# Altium PCB 06002480宁波2号线二期车载PIS系统_功率放大器音频板2 BHC-A-2030-05_PCB V1.0.PcbDoc (part 1 of 6)
Units mil, origin at the board's own origin, x right, y up, seen from the top; angles counter-clockwise.
Board outline 3385.83 x 3779.53 mil, 4 copper layers (Top Layer, GND, VDD, Bottom Layer); 210 components, 185 nets, 792 pads, 313 vias.
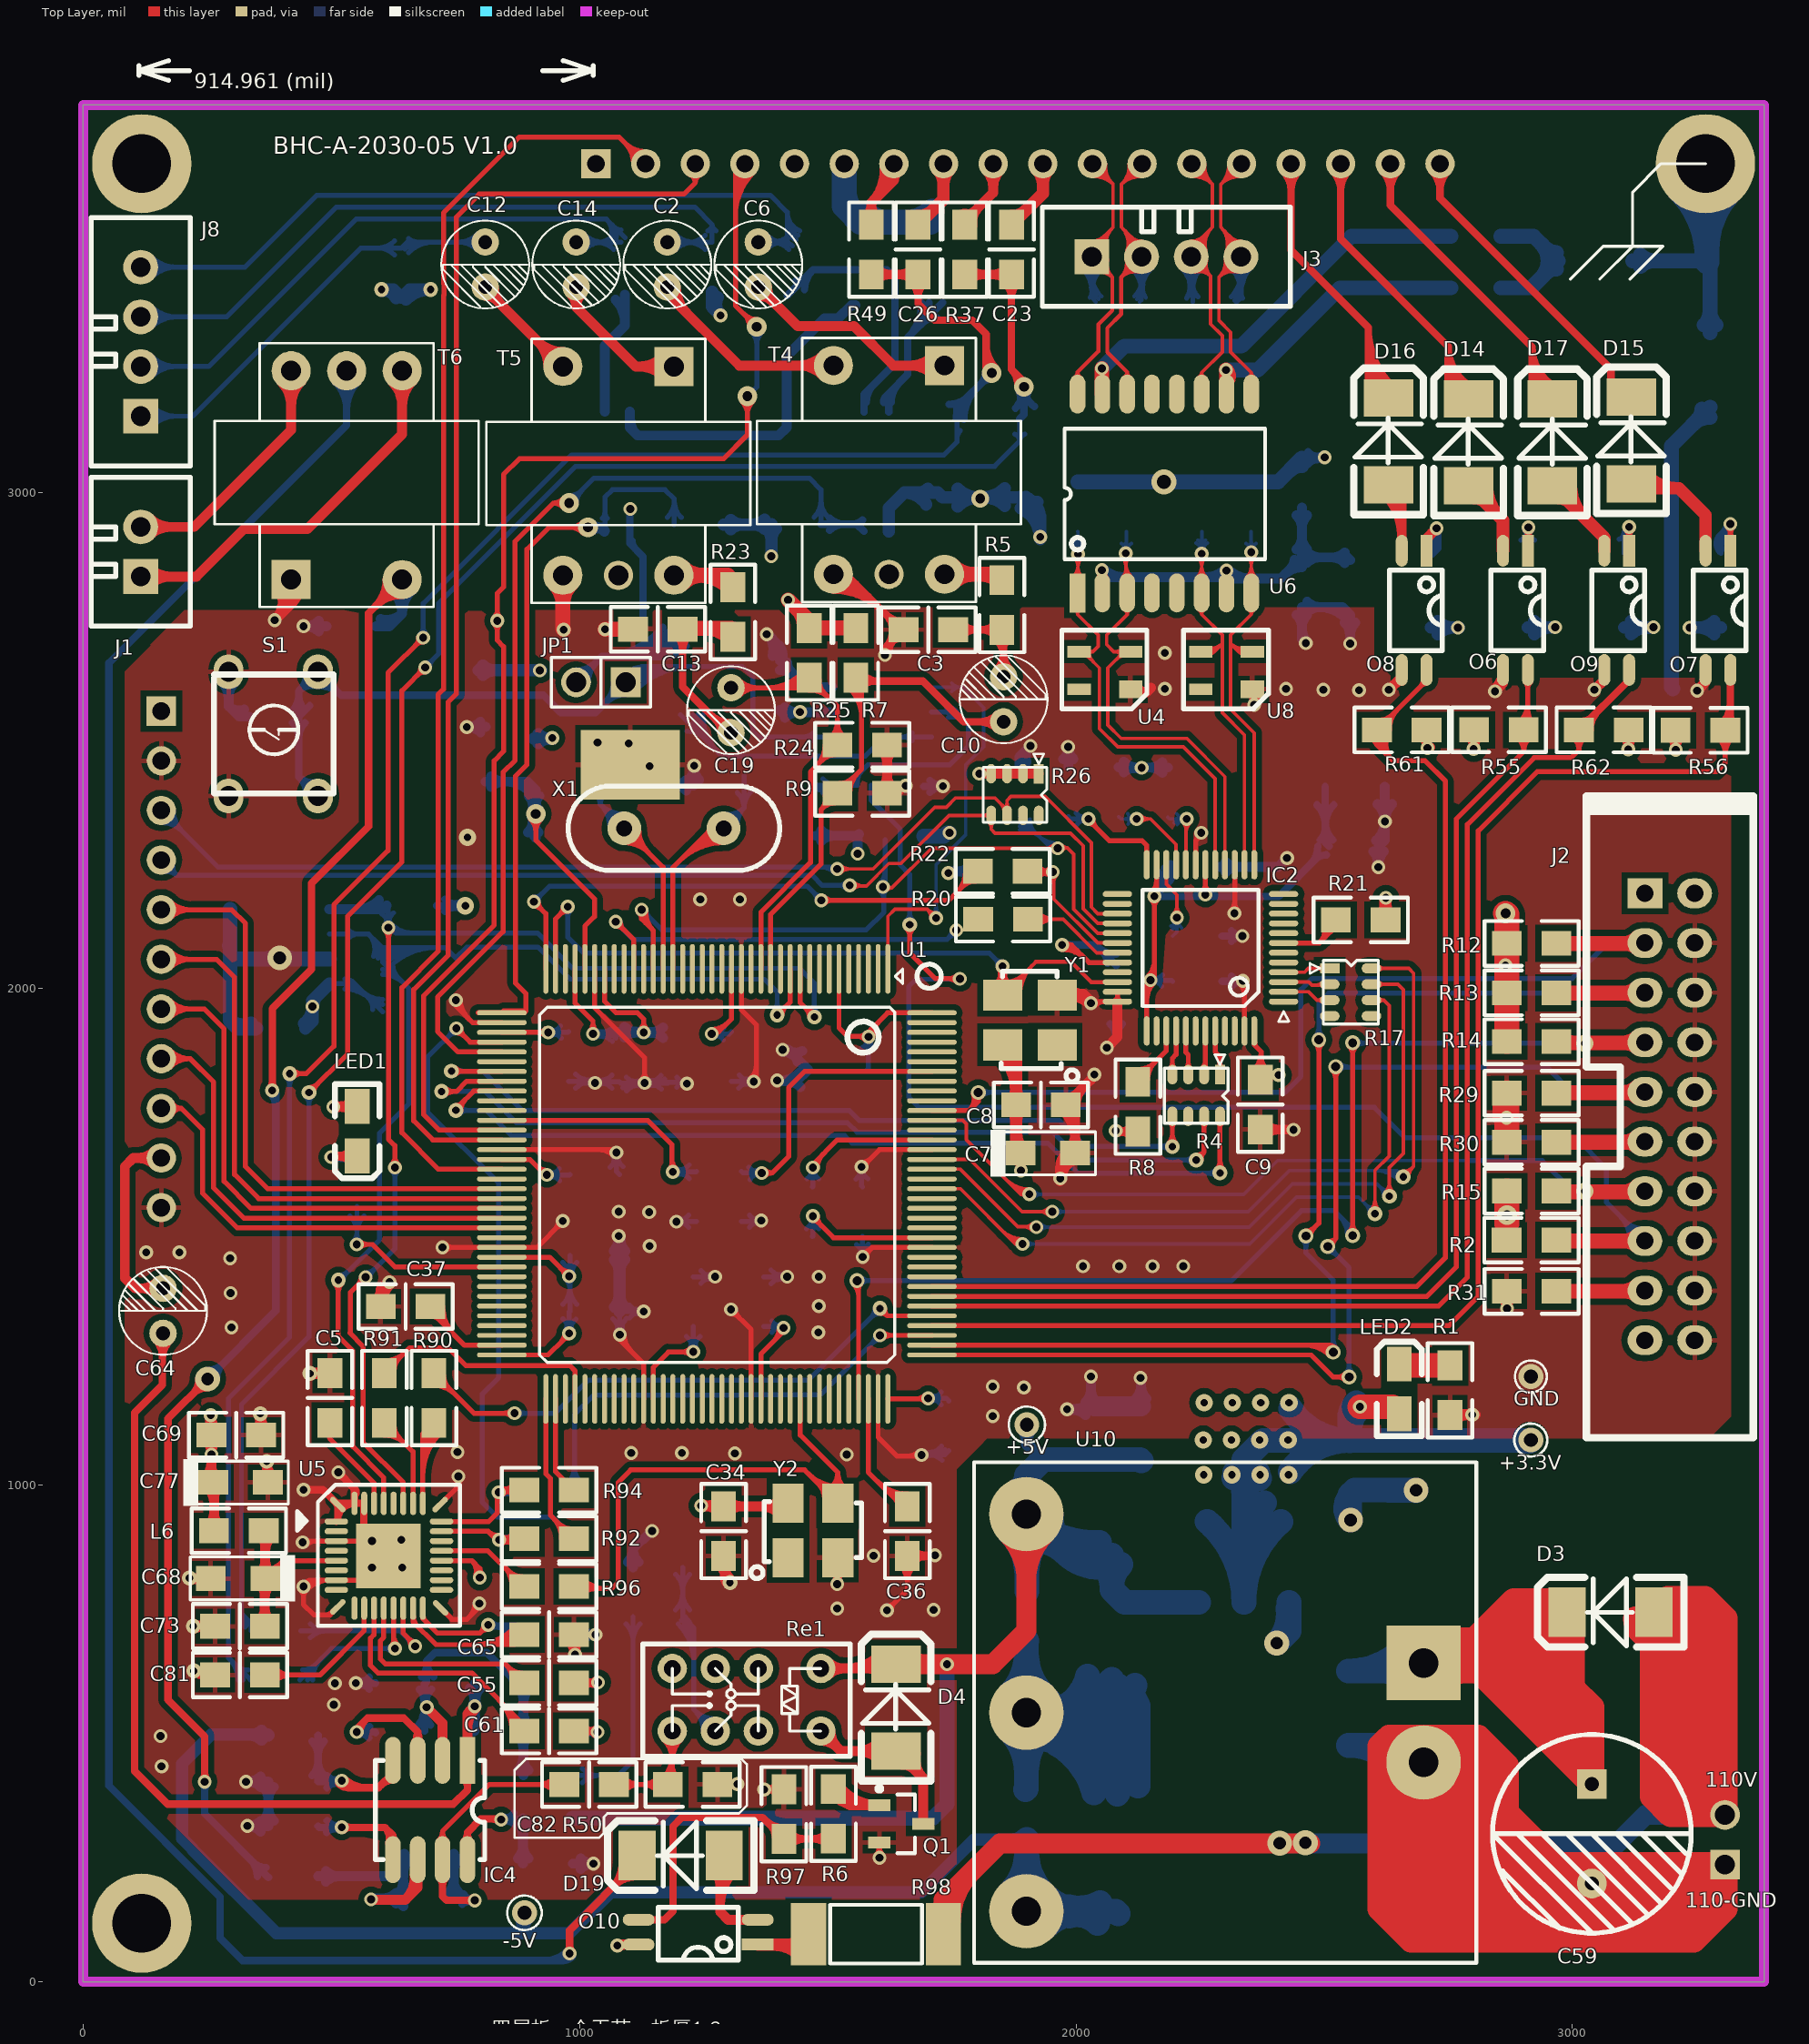
[diagram p0: Top Layer view]
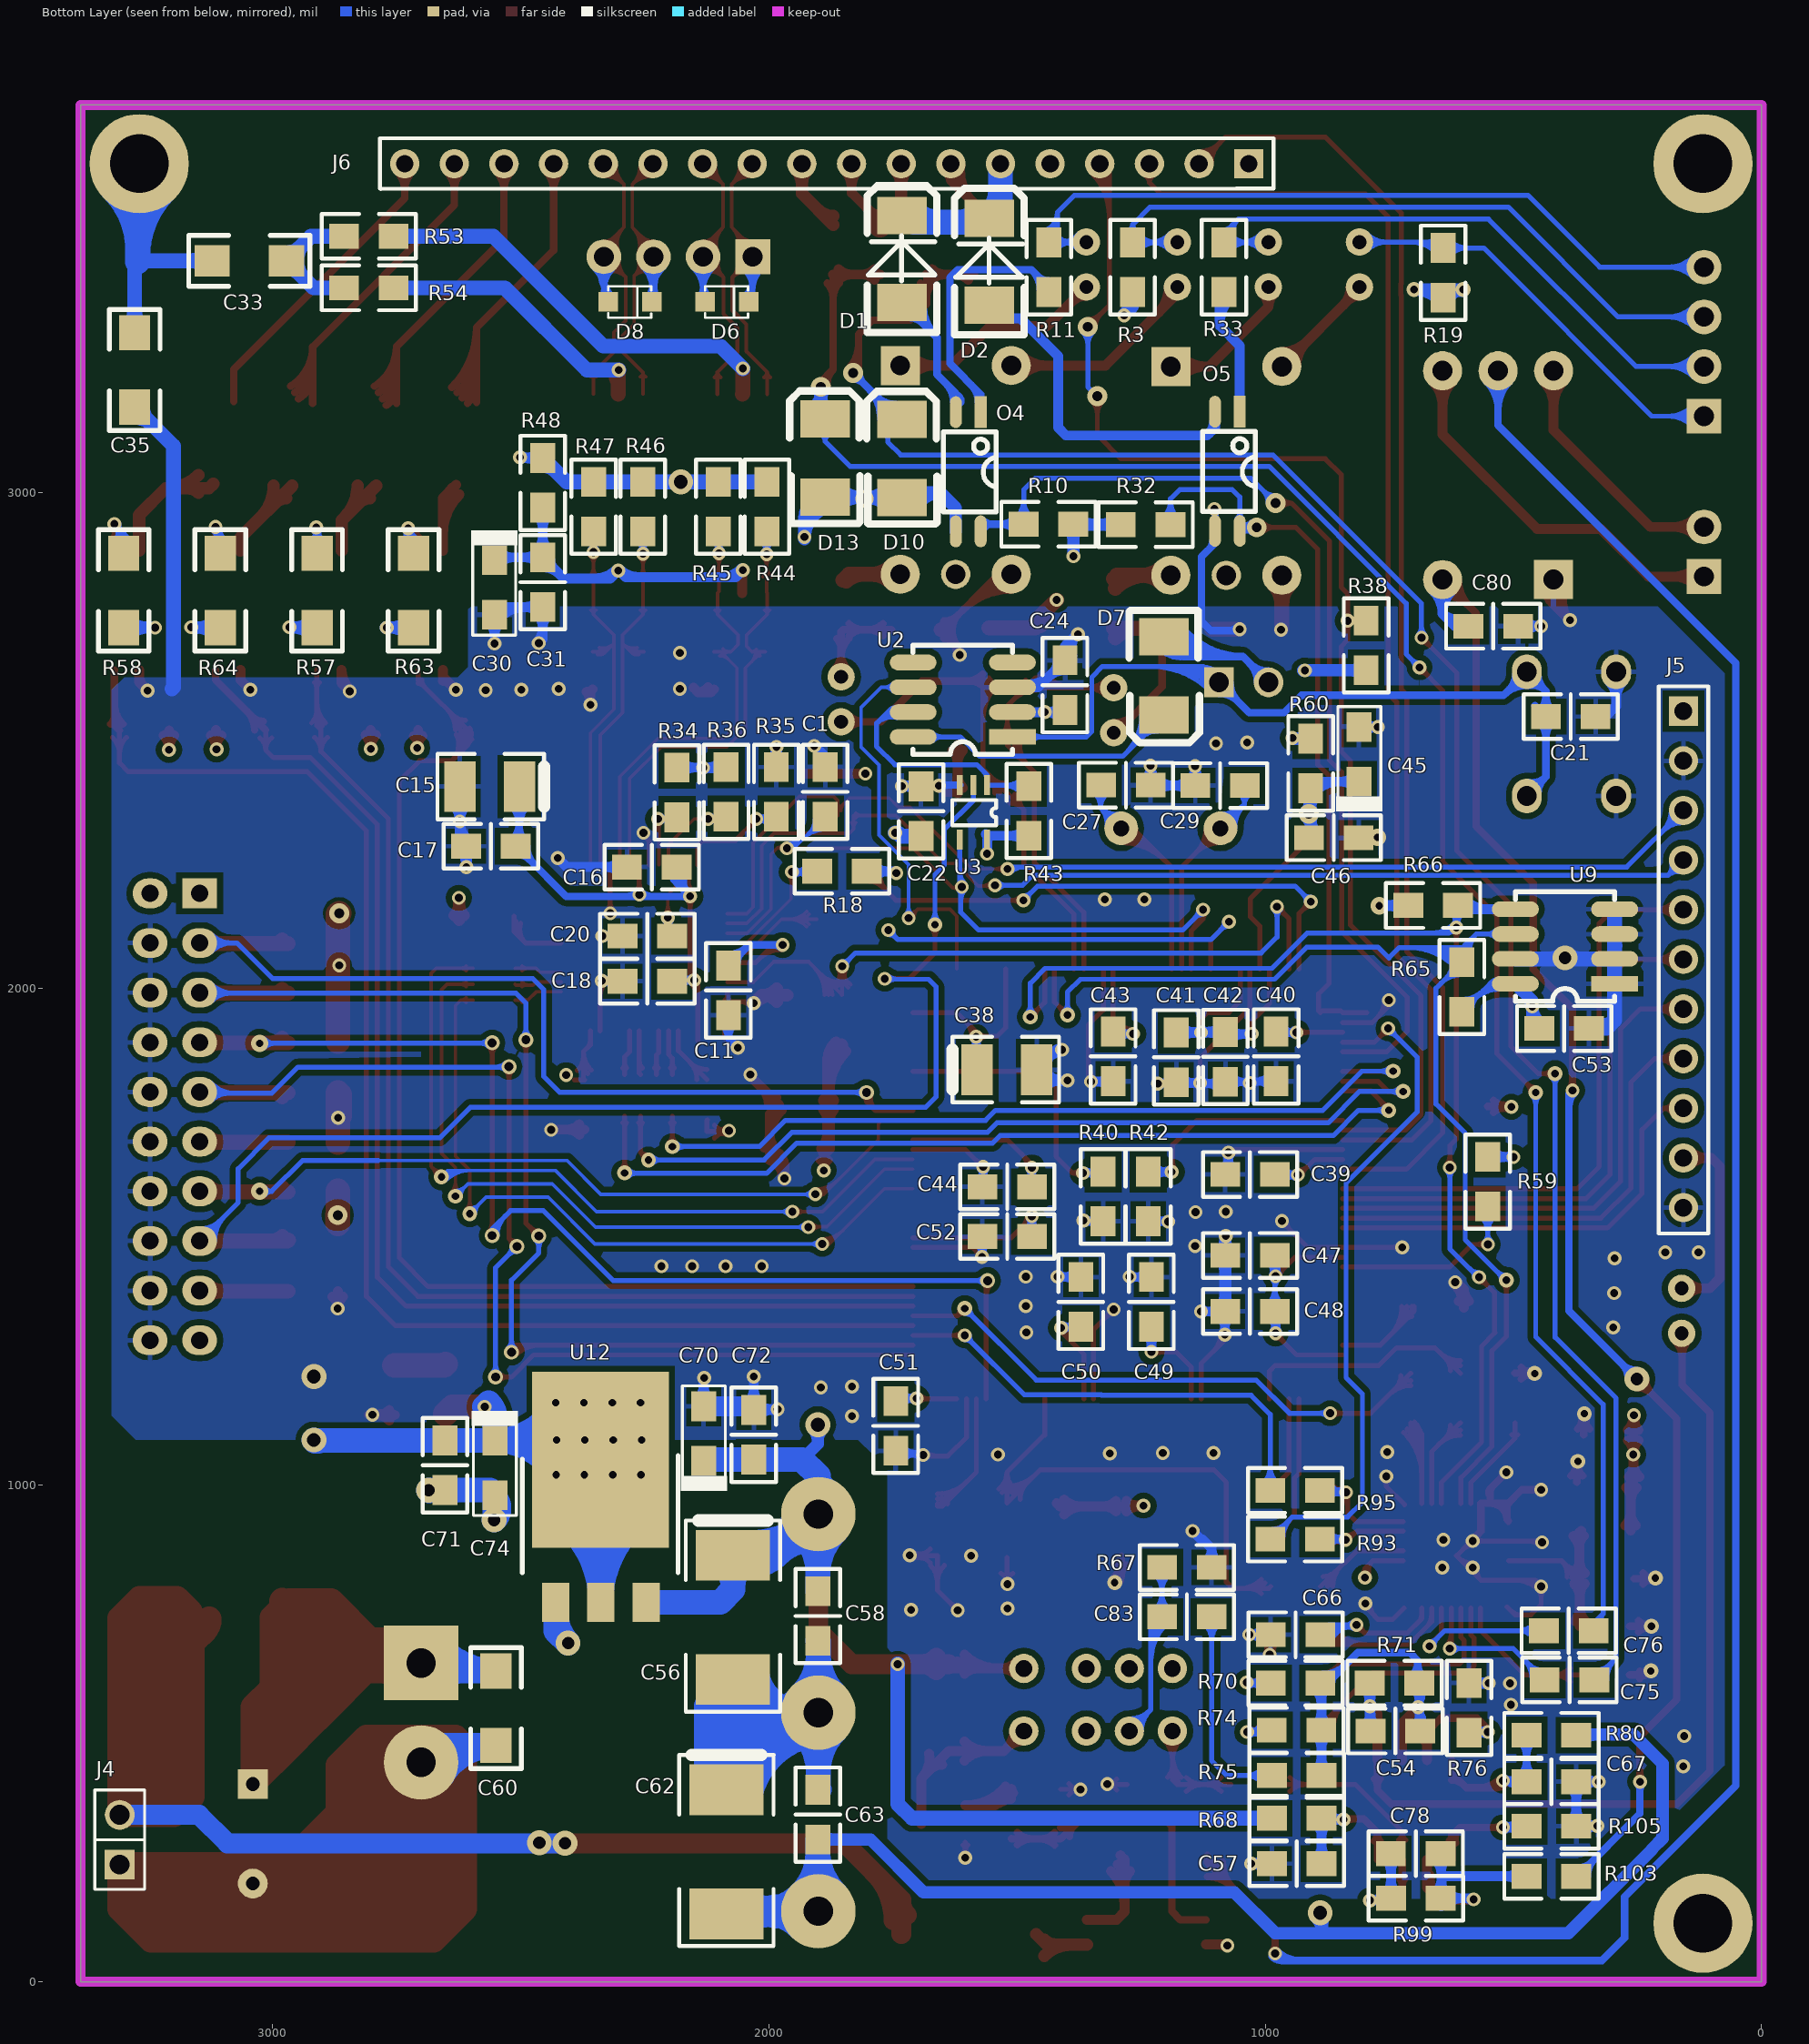
[diagram p1: Bottom Layer view, seen from below]
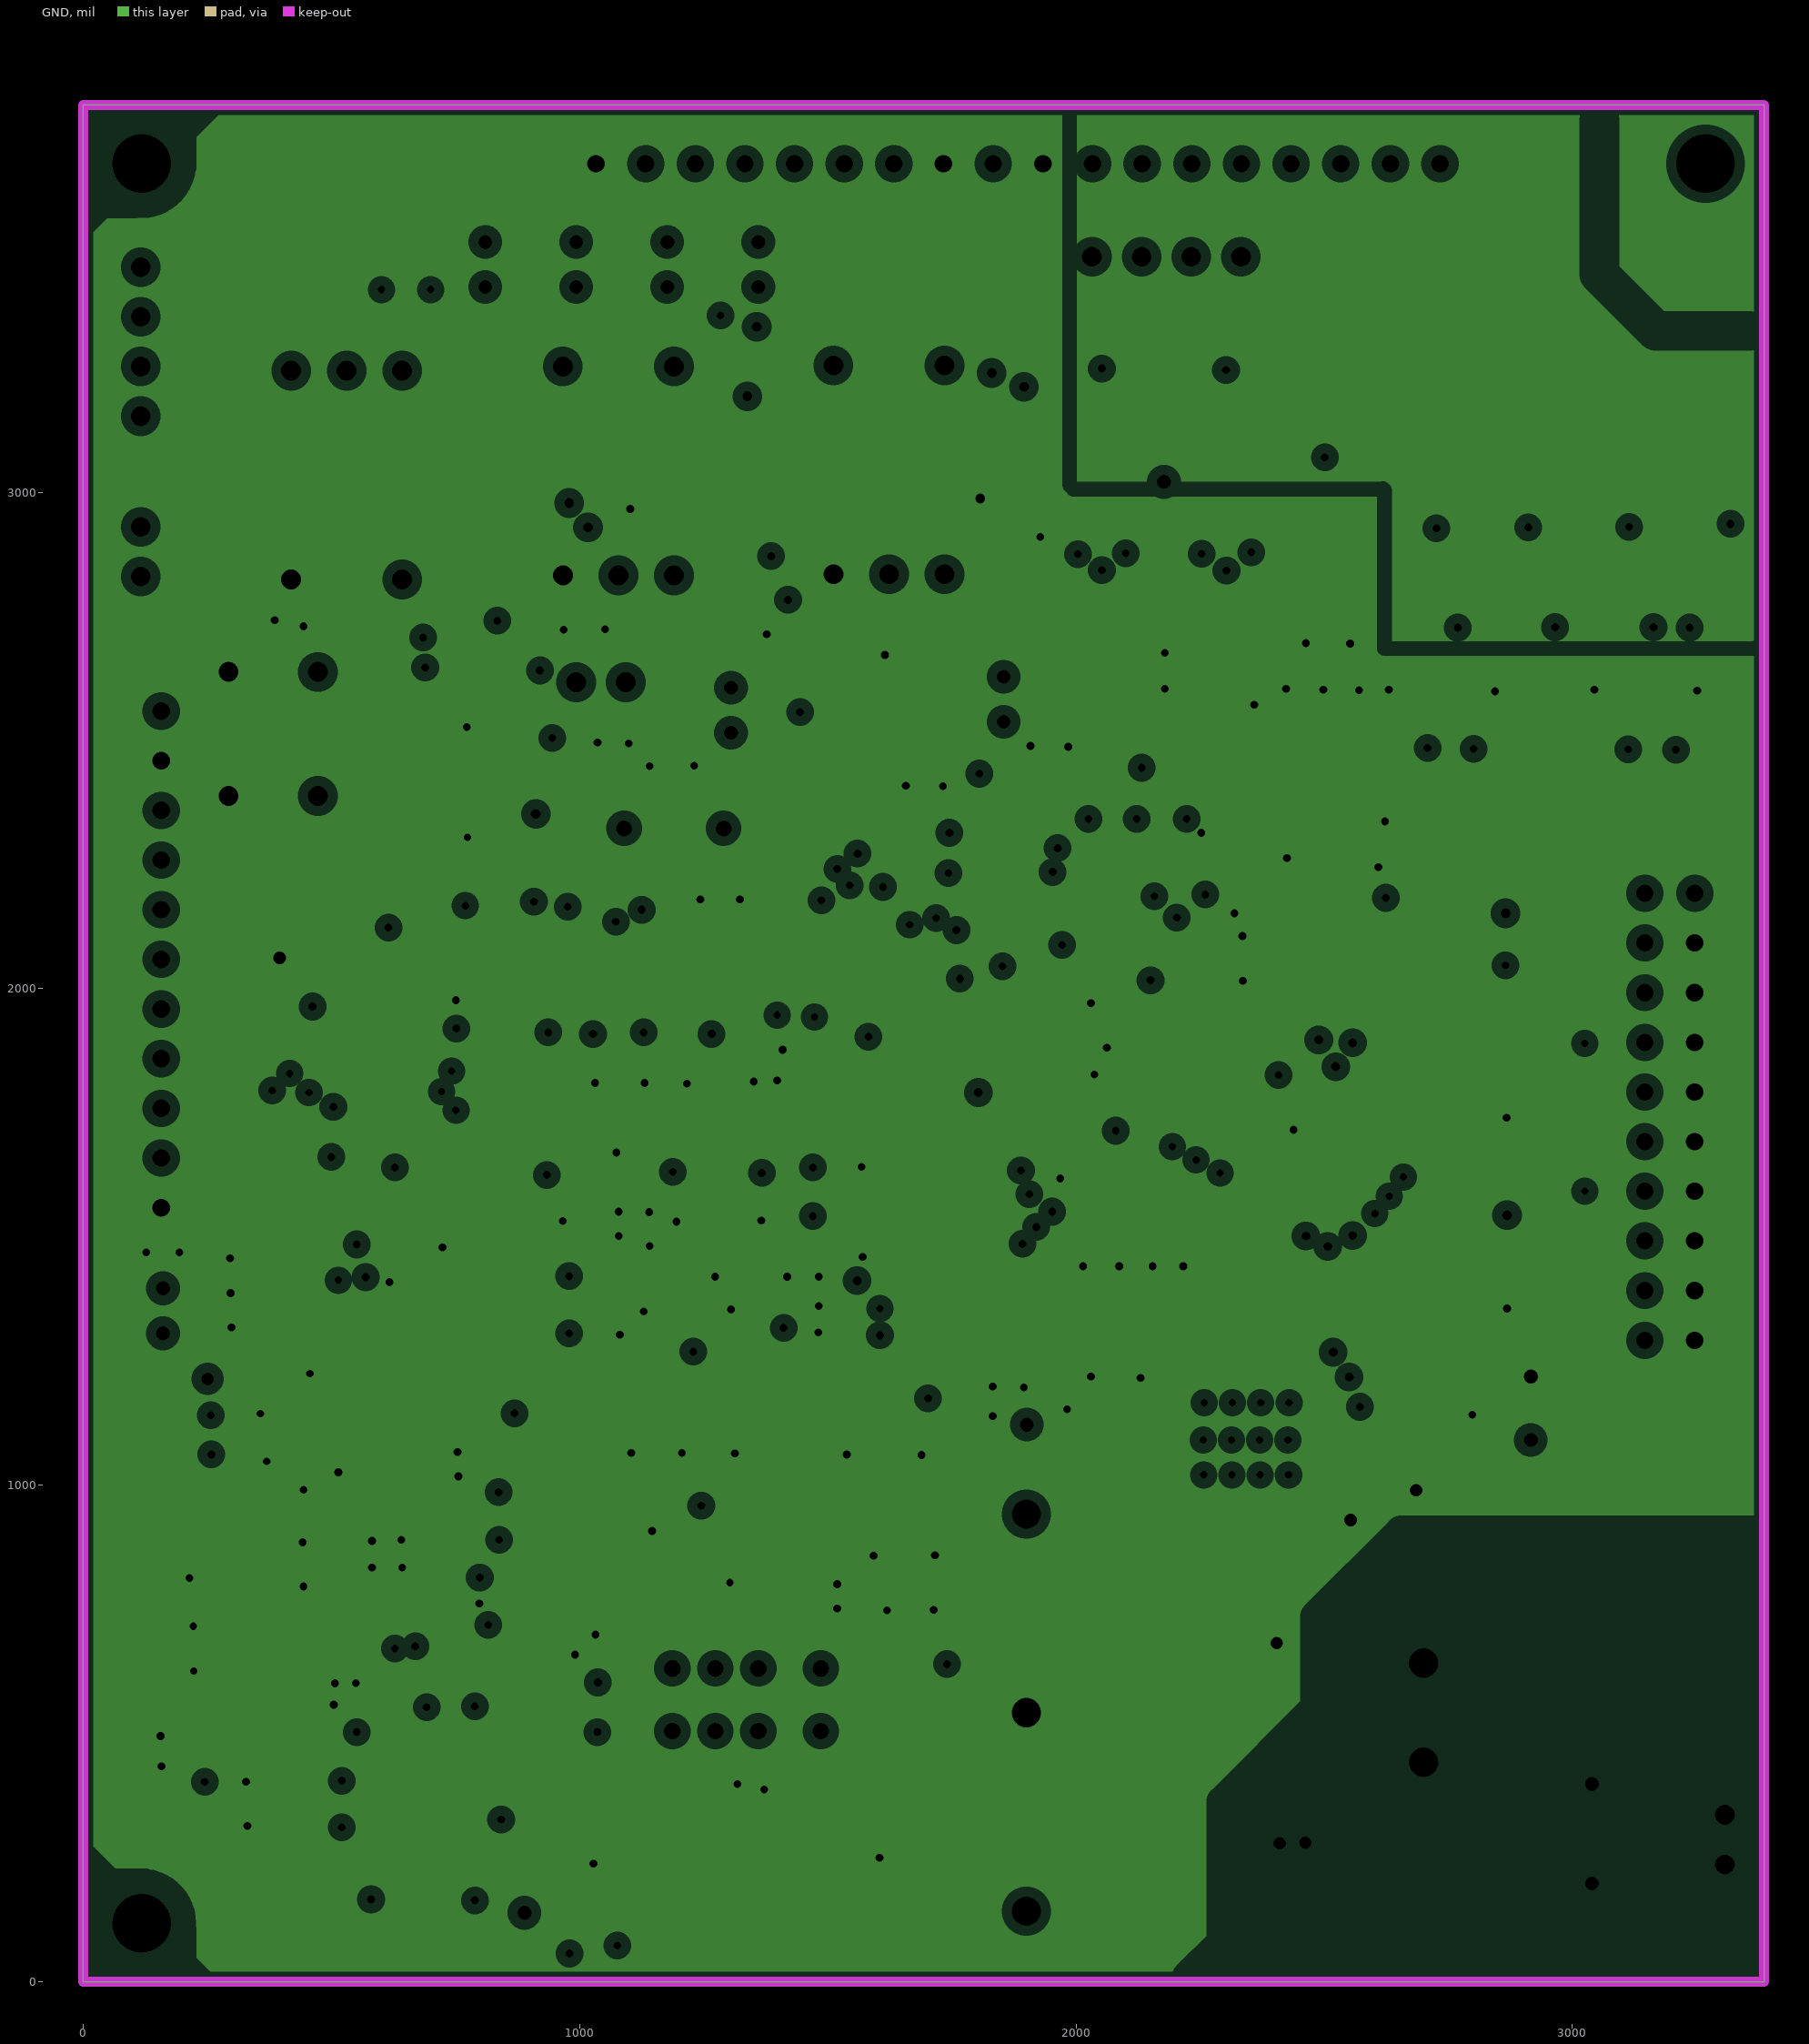
[diagram p2: GND, clearances drawn from the general rule]
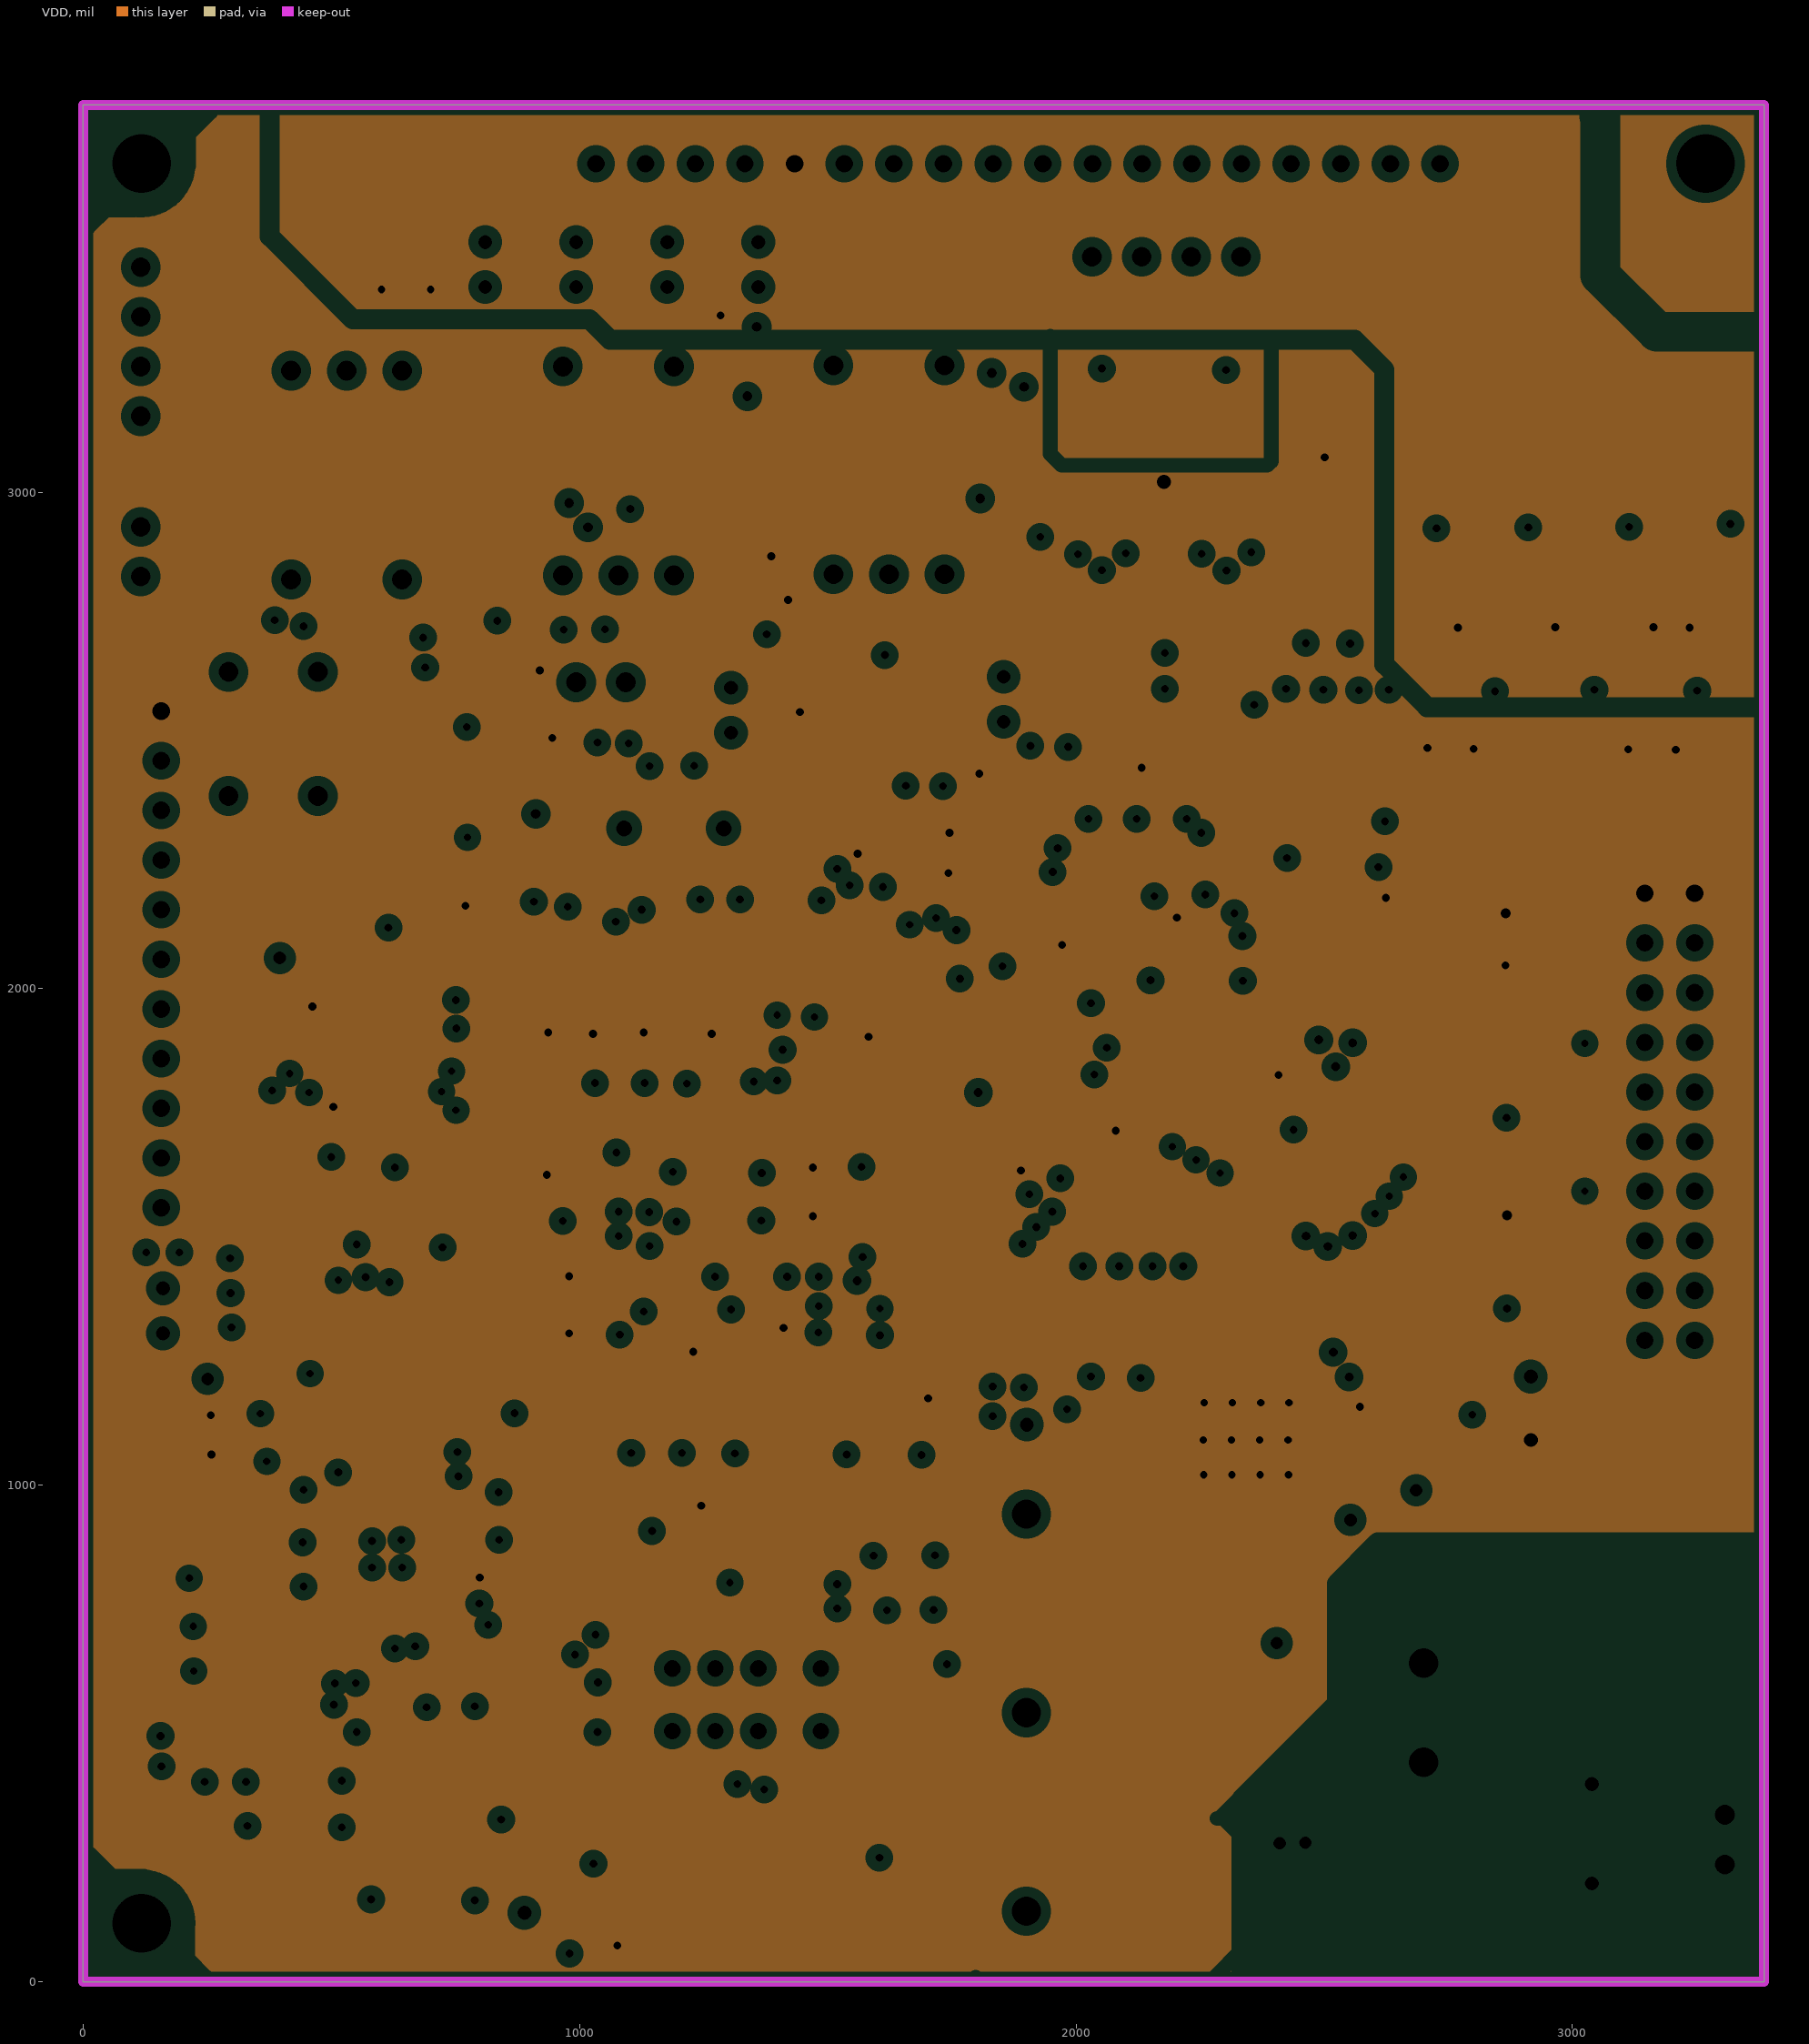
[diagram p3: VDD, clearances drawn from the general rule]
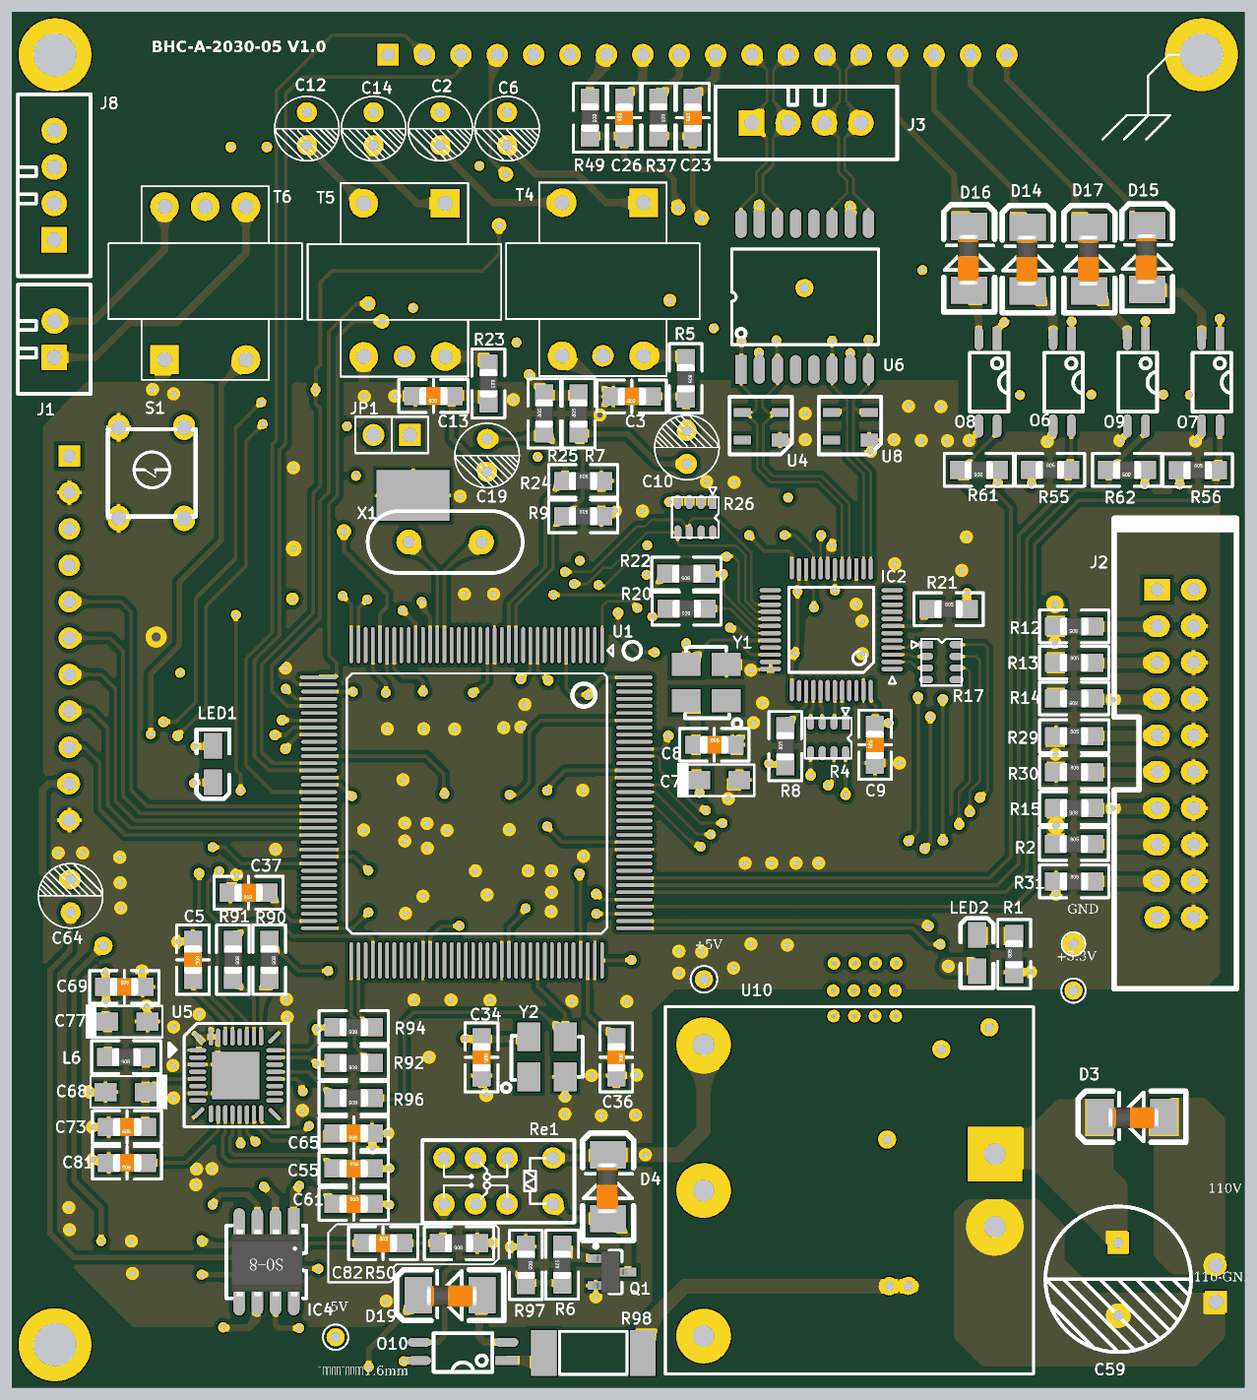
[diagram p9: 3D render of the assembled board from above, using the file's embedded part models]
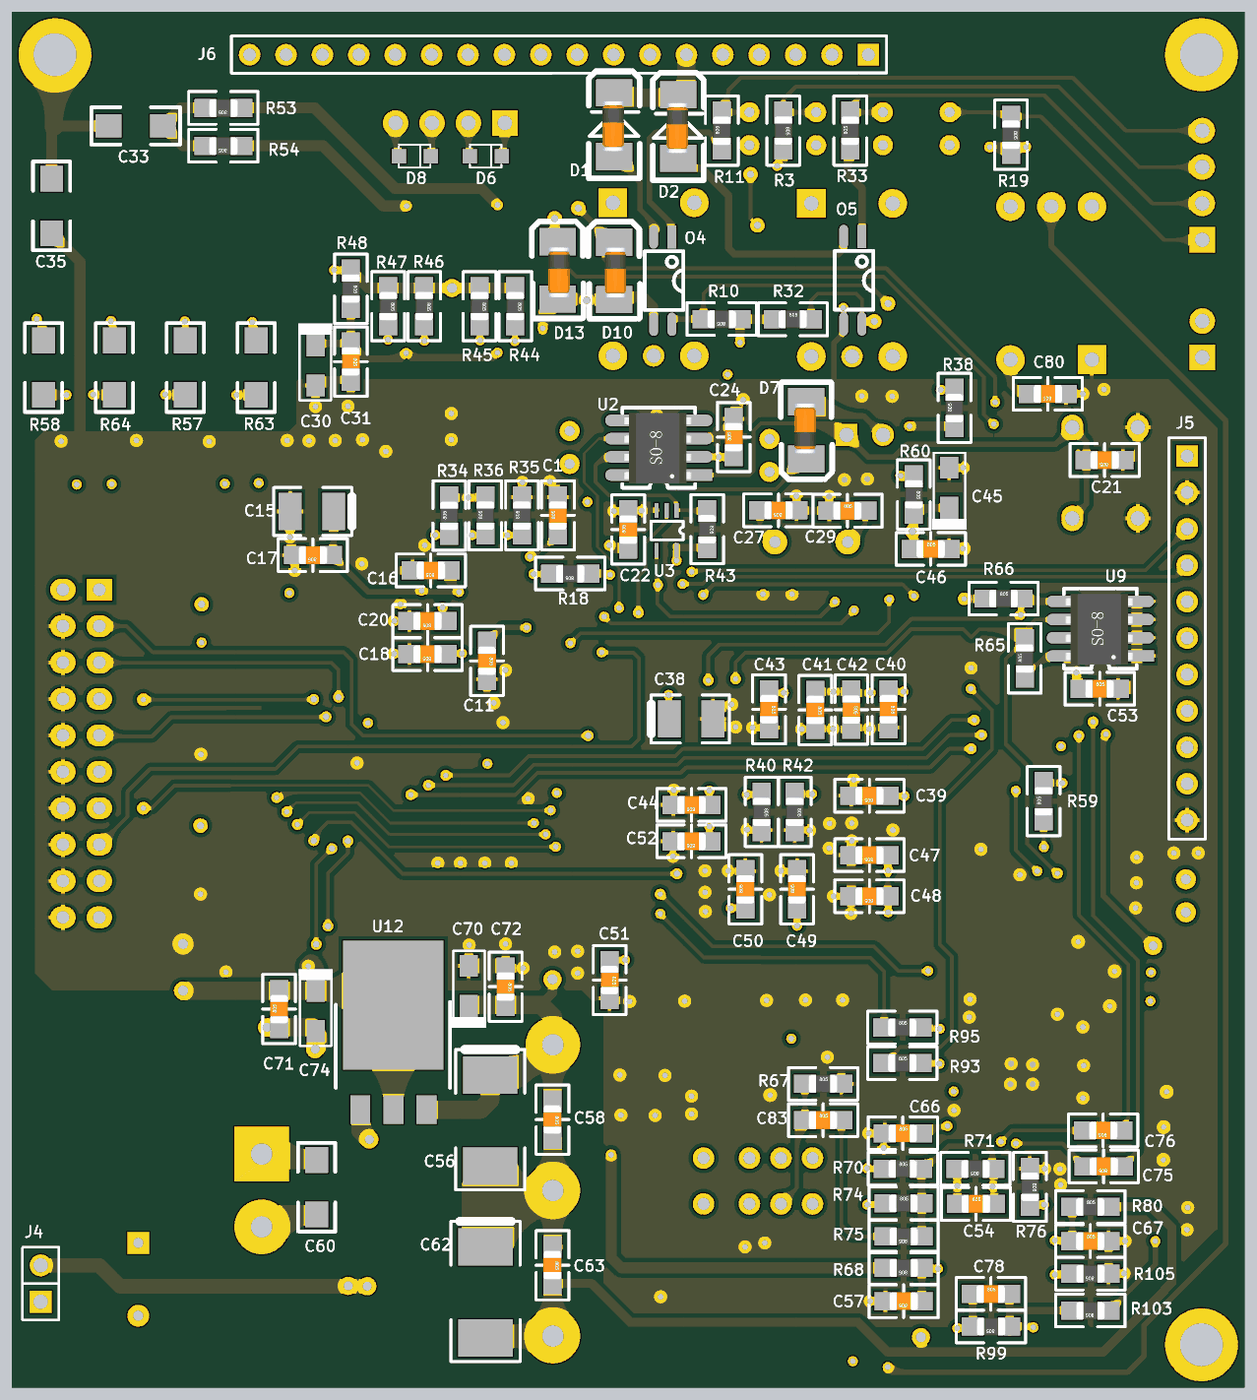
[diagram p10: 3D render of the assembled board from below, using the file's embedded part models]

## Layer stack, top to bottom
Top Layer: signal copper 1.4
Dielectric: core 12.6, FR-4, Dk 4.8
GND: plane copper 1.4, net (Multiple Nets)
Dielectric: prepreg 12.6, FR-4, Dk 4.8
VDD: plane copper 1.4, net (Multiple Nets)
Dielectric: core 12.6, FR-4, Dk 4.8
Bottom Layer: signal copper 1.4

## Board outline
0,0 0,3779.53 3385.83,3779.53 3385.83,0

## Design rules (kind name [scope] priority, off if disabled: settings)
Clearance Clearance_1 [InPolygon] p1: gap=12
Clearance [All] p2: gap=7
ComponentClearance [All] p1: gap=0 collisioncheckmode=3 verticalgap=0 showdistances=FALSE
DiffPairsRouting [All] p1: maxlimit=10 minlimit=10 mostfreqgap=10 maxuncoupledlength=500
HoleSize [All] p1: absolutevalues=TRUE maxlimit=500 minlimit=1 maxpercent=80.000 minpercent=20.000
HoleToHoleClearance [All] p1: gap=0 allowstackedmicrovias=TRUE
MinimumSolderMaskSliver [All] p1: minsoldermaskwidth=0
PlaneClearance [All] p1: clearance=20
PlaneConnect [All] p1: planeconnectstyle=Relief reliefexpansion=20 reliefentries=4 reliefconductorwidth=25 reliefairgap=15
PolygonConnect PolygonConnect_1 [Isvia] p1: connectstyle=Direct reliefconductorwidth=10 reliefentries=4 polygonreliefangle="90 Angle" airgapwidth=10
PolygonConnect [All] p2: connectstyle=Relief reliefconductorwidth=10 reliefentries=4 polygonreliefangle="90 Angle" airgapwidth=10
RoutingVias [All] p1: holewidth=20 width=40 viastyle="Through Hole" minholewidth=15 minwidth=28 maxholewidth=28 maxwidth=50
SilkToSilkClearance [All] p1: silktosilkclearance=0
SilkToSolderMaskClearance [IsPad] p1: minsilkscreentomaskgap=0 clearancetoexposedcopper=TRUE
SolderMaskExpansion [All] p1: expansion=4
Width [All] p1: maxlimit=50 minlimit=7 preferedwidth=10 minimp=50.000000 maximp=50.000000 favimp=50.000000
19 further rules are at their usual default settings.

## Classes and differential pairs
differential pair MB_TX: +MB_TX_P -MB_TX_N
differential pair MB_RX: +MB_RX_P -MB_RX_N
differential pair RD: +RD_P -RD_N
differential pair TD: +TD_P -TD_N

## Components (designator, comment, footprint, x,y, rotation, side; value= is the part's Value field where it differs from the comment)
C1 "100n" C0805 1886,2396 r270 bottom
C2 "10uF/25V" RB1/2 1176.67,3503.55 r270 top
C3 "" C0805 1703,2723 r0 top
C5 "100n" C0805 497,1176 r90 top
C6 "10uF/25V" RB1/2 1360,3503.55 r270 top
C7 "" 3216A 1943,1669 r0 top
C8 "104" C0805 1929,1766 r180 top
C9 "104" C0805 2371,1766 r270 top
C10 "10uF/25V" RB1/2 1854,2537.45 r90 top
C11 "104" C0805 2081,1997 r90 bottom
C12 "10uF/25V" RB1/2 810,3503.55 r270 top
C13 "" C0805 1158,2724 r0 top
C14 "10uF/25V" RB1/2 993.33,3503.55 r270 top
C15 "10uF/16V" CAP-B 2502,2407 r0 bottom
C16 "104" C0805 2235,2245 r180 bottom
C17 "104" C0805 2559,2287 r180 bottom
C18 "104" C0805 2244,2015 r180 bottom
C19 "10uF/25V" RB1/2 1305,2606 r270 top
C20 "104" C0805 2244,2106 r180 bottom
C21 "102" C0805 384,2548 r180 bottom
C22 "104" C0805 1693,2357 r270 bottom
C23 "" C0805 1870,3488 r270 top
C24 "104" C0805 1403,2611 r270 bottom
C26 "" C0805 1681.78,3488 r270 top
C27 "" C0805 1280,2410 r180 bottom
C29 "22pF" C0805 1091,2409 r0 bottom
C30 "10uF/10V" 3216A 2552,2808 r270 bottom
C31 "104" C0805 2455,2819 r90 bottom
C33 "1000p(2KV)" C1206 3046,3466 r180 bottom
C34 "104" C0805 1290,908 r90 top
C35 "1000p(2KV)" C1206 3277,3246 r270 bottom
C36 "2.2uF" C0805 1660,908 r90 top
C37 "2.2uF" C0805 650,1360 r0 top
C38 "" CAP-B 1580,1837 r180 bottom
C39 "104" C0805 1030,1626 r180 bottom
C40 "104" C0805 978,1864 r90 bottom
C41 "104" C0805 1179,1862 r90 bottom
C42 "104" C0805 1080,1863 r90 bottom
C43 "104" C0805 1306,1864 r90 bottom
C44 "104" C0805 1519,1601 r180 bottom
C45 "" 3216A 811,2472 r90 bottom
C46 "104" C0805 862,2304 r0 bottom
C47 "104" C0805 1030,1463 r180 bottom
C48 "104" C0805 1030,1350 r180 bottom
C49 "104" C0805 1229,1369 r270 bottom
C50 "104" C0805 1371,1369 r270 bottom
C51 "104" C0805 1744,1120 r90 bottom
C52 "104" C0805 1519,1501 r180 bottom
C53 "104" C0805 398,1920 r0 bottom
C54 "47pF" C0805 738,505 r0 bottom
C55 "104" C0805 938.31,602.06 r180 top
C56 "100uF/16V" CAP-D 2072,859 r270 bottom
C57 "104" C0805 935.96,238 r180 bottom
C58 "104" C0805 1901,737 r90 bottom
C59 "100uF/16V" E100 3039,398 r270 top
C60 "" M1206 2549,551 r90 bottom
C61 "104" C0805 938.31,505 r180 top
C62 "100uF/16V" CAP-D 2085,387 r270 bottom
C63 "104" C0805 1901,337 r90 bottom
C64 "10uF/25V" RB1/2 161,1306 r90 top
C65 "1uF" C0805 939.04,699.22 r0 top
C66 "1uF" C0805 939,699 r0 bottom
C67 "104" C0805 423.69,403 r0 bottom
C68 "22uF/6.3V" 3216A 312,812 r180 top
C69 "100n" C0805 308,1101 r180 top
C70 "10uF/10V" 3216A 2131,1104 r90 bottom
C71 "104" C0805 2652,1040 r270 bottom
C72 "104" C0805 2030,1102 r90 bottom
C73 "100n" C0805 316.36,716.05 r0 top
C74 "22uF/6.3V" 3216A 2551,1035 r270 bottom
C75 "104" C0805 386.64,608.05 r180 bottom
C76 "104" C0805 388,707 r180 bottom
C77 "22uF/6.3V" 3216A 317,1006 r0 top
C78 "47pF" C0805 697,258 r0 bottom
C80 "100p" C0805 540,2730 r180 bottom
C81 "100n" C0805 316.36,618.05 r0 top
C82 "4.7uF" C0805 1019,397.32 r180 top
C83 "4.7uF" C0805 1158,735 r0 bottom
D1 "DIODE" 7227AK 1732,3469 r90 bottom
D2 "DIODE" 7227AK 1556,3464 r90 bottom
D3 "DIODE" 7227AK 3077,744 r180 top
D4 "1N4004" 7227AK 1637,552 r90 top
D6 "BV05C" SOD-323 2128,3383 r180 bottom
D7 "" 1206AK 1203,2630 r270 bottom
D8 "BV05C" SOD-323 2323,3383 r180 bottom
D10 "" 1206AK 1732,3068 r90 bottom
D13 "" 1206AK 1887,3069 r90 bottom
D14 "DIODE" 7227AK 2790,3100 r90 top
D15 "DIODE" 7227AK 3118,3104 r90 top
D16 "DIODE" 7227AK 2629,3102 r90 top
D17 "DIODE" 7227AK 2959,3100 r90 top
D19 "DIODE" 7227AK 1204,254 r180 top
IC2 "DP83848C" LQFP48 2418,1974 r180 top locked
IC4 "MC4558" SO-8 774,446 r270 top
J1 "CON2" CH2.54-2 116,2830 r90 top
J2 "IDC20" IDC3-20 3146,2192 r270 top
J3 "CON4" CH2.54-4 2032,3474 r0 top
J4 "CON2" SIP2.54-2 3307.09,236.22 r90 bottom locked
J5 "CON11" SIP2.54-11 157.48,2559.06 r90 bottom
J6 "CON18" SIP2.54-18 1033.07,3661.41 r0 bottom
J8 "CON4" CH2.54-4 116,3153 r90 top
JP1 "2.54-2P" SIP2.54-2 1093,2617 r180 top
L6 "10uH" M0805 314,908 r180 top
LED1 "" LED(贴片) 552,1763 r90 top
LED2 "" LED(贴片) 2651,1144 r270 top
O4 "TLP281" SOP4 1573,3161 r270 bottom
O5 "TLP281" SOP4 1051,3162 r270 bottom
O6 "TLP281" SOP4 2910,2882 r270 top
O7 "TLP281" SOP4 3318,2882 r270 top
O8 "TLP281" SOP4 2706,2882 r270 top
O9 "TLP281" SOP4 3114,2882 r270 top
O10 "TLP281" SOP4 1359,75 r180 top
Q1 "MMBT5551" SOT-23B_N 1648,318 r0 top
R1 "" M0805 2753,1191 r90 top
R2 "10K" M0805 2917,1494 r0 top
R3 "" M0805 1266.6,3453.32 r270 bottom
R4 "33*4" PZ-4-0.8B 2290,1817 r180 top
R5 "" M0805 1851,2773 r270 top
R6 "Res3" M0805 1511,338 r90 top
R7 "" M0805 1556,2676 r90 top
R8 "10K" M0805 2124,1762 r90 top
R9 "" M0805 1569,2394 r0 top
R10 "" M0805 1436,2935 r0 bottom
R11 "" M0805 1436,3452.68 r90 bottom
R12 "10K" M0805 2918,2091 r180 top
R13 "10K" M0805 2917.35,1992 r0 top
R14 "10K" M0805 2918,1893 r180 top
R15 "10K" M0805 2918,1592 r180 top
R17 "33*4" PZ-4-0.8B 2521,2041 r270 top
R18 "10K" M0805 1852,2236 r0 bottom
R19 "" M0805 641,3442 r270 bottom
R20 "" M0805 1853.32,2139.63 r180 top
R21 "10K" M0805 2573,2139 r0 top
R22 "" M0805 1852.65,2236 r180 top
R23 "" M0805 1309,2759 r270 top
R24 "" M0805 1569,2491 r0 top
R25 "" M0805 1462,2676 r90 top
R26 "" PZ-4-0.8B 1925,2423 r180 top
R29 "10K" M0805 2917.35,1790 r0 top
R30 "10K" M0805 2917.35,1691.14 r0 top
R31 "10K" M0805 2917.35,1391 r0 top
R32 "" M0805 1241,2935 r180 bottom
R33 "" M0805 1083.37,3452.68 r90 bottom
R34 "10K" M0805 2185,2395 r90 bottom
R35 "" M0805 1985,2396 r90 bottom
R36 "10K" M0805 2086,2396 r90 bottom
R37 "" M0805 1776.22,3488.69 r270 top
R38 "" M0805 797,2691 r90 bottom
R40 "10K" M0805 1326,1582 r270 bottom
R42 "10K" M0805 1235,1582 r270 bottom
R43 "" M0805 1475.63,2358.32 r270 bottom
R44 "" M0805 2003,2971 r270 bottom
R45 "" M0805 2101,2971 r270 bottom
R46 "" M0805 2253,2971 r270 bottom
R47 "" M0805 2352,2971 r270 bottom
R48 "" M0805 2454.58,3019 r270 bottom
R49 "" M0805 1588,3488.69 r270 top
R50 "10k" M0805 1228,397 r180 top
R53 "" M0805 2805,3515 r0 bottom
R54 "" M0805 2805,3411 r0 bottom
R55 "" M0805 2851.32,2521.63 r0 top
R56 "" M0805 3257.32,2520.63 r0 top
R57 "" M1206 2909.67,2802 r270 bottom
R58 "" M1206 3299,2802 r270 bottom
R59 "" M0805 552,1611 r90 bottom
R60 "" M0805 908,2454 r270 bottom
R61 "" M0805 2656.32,2520.63 r180 top
R62 "" M0805 3063.32,2520.63 r180 top
R63 "" M1206 2715,2802 r270 bottom
R64 "" M1206 3104.33,2802 r270 bottom
R65 "" M0805 604,2003 r90 bottom
R66 "" M0805 662,2168 r180 bottom
R67 "10k" M0805 1158,835 r180 bottom
R68 "100R" M0805 936,329 r0 bottom
R70 "15k" M0805 939,602 r180 bottom
R71 "11k" M0805 739,601 r0 bottom
R74 "10k" M0805 937,507 r180 bottom
R75 "10k" M0805 936,415 r0 bottom
R76 "10k" M0805 589,552 r270 bottom
R80 "100R" M0805 423.65,497 r180 bottom
R90 "51" M0805 707,1175.96 r270 top
R91 "51" M0805 607,1175.96 r270 top
R92 "51" M0805 939,892 r180 top
R93 "51" M0805 940,892 r180 bottom
R94 "51" M0805 939,990 r180 top
R95 "51" M0805 940,990 r180 bottom
R96 "51" M0805 939,795.87 r180 top
R97 "" M0805 1412,338 r270 top
R98 "" 1T-2512 1597,96 r0 top
R99 "11k" M0805 696,168 r0 bottom
R103 "10k" M0805 423,212 r0 bottom
R105 "10k" M0805 423,313 r0 bottom
Re1 "AGN20012 G6J-2P-Y" G6J-2P 1486,631 r270 top
S1 "SW-PB" KEY-6A 383,2513 r270 top
T4 "EE13" EE13-C#1 1735,3255 r270 top locked
T5 "EE13" EE13-C#1 1190,3253 r270 top locked
T6 "1:1" EE13-C#2 419,2824 r90 top
U1 "STM32F207Zx" LQFP144 1621,2040 r180 top locked
U2 "MAX706R" so-8 1509,2507 r0 bottom
U3 "74LVC1G08" SOT-23-5+ 1560,2410 r270 bottom
U4 "SR3.3" SOT-143 2110,2603 r90 top
U5 "SGTL5000-XNAA3_0" QFN32 510,927 r0 top
U6 "H1102" SOP-16 2003,2797 r90 top
U8 "SR3.3" SOT-143 2355,2603 r90 top
U9 "AT24C32-2.7" SO-8 296,2010 r0 bottom
U10 "" YND5-48D12 2700,542 r180 top locked
U12 "AS2815AR-3.3" TO-252-1 2429,764 r180 bottom
X1 "25MHz" XTAL-D 1090,2323 r0 top
Y1 "50MHz" XTAL-XO53 1962,1887 r90 top
Y2 "11.2896MHz" XTAL-XO53 1420,854 r0 top

## Footprints (in the part's own frame and the unit in brackets; to place one, negate y for a bottom-side part, rotate by r counter-clockwise, add the part's x,y. Pads: shape width x height; smd on the part's side, far side on the other; paste and mask are expansions set on the pad)
1T-2512 [mm] "Chip Resistor; Body 6.4 x 3.2 mm (LxW typ)"
  rect 1.8x3.2 smd: 1(-3.45,0) 2(3.45,0)
  silkscreen extent -2.35,-1.5 2.35,1.5, body extent -3.66,-1.5 3.66,1.5, height 1
1206AK [mm]
  rect 1.905x2.54 smd: A(-2,-0.013) K(2,-0.013)
  silkscreen extent -3.35,-1.8 3.42,1.79, body extent -1.88,-0.85 1.62,0.65, height 0.75
3216A [mil]
  rect 60x50 smd: 1(-55,0) 2(55,0)
  silkscreen extent -115,-48 96,46
7227AK [mil]
  rect 75x100 smd: A(-87.25,-0.5) K(87.75,-0.5)
  silkscreen extent -147,-71 148,69, body extent -73,-28 65,31, height 57
C0805 [mil]
  rect 60x50 smd: 1(-50.36,-0.05) 2(49.64,-0.05)
  silkscreen extent -95,-45 95,45, body extent -39,-25 39,25, height 31
C1206 [mm]
  rect 1.8x1.6 smd: 1(-1.9,0) 2(1.9,0)
  silkscreen extent -3.1,-1.3 3.1,1.3, body extent -1.96,-1.3 1.9,1.3, height 1.5
CAP-B [mm] "钽电容10uF/10V"
  rect 1.6x2.6 smd: 1(0,0) 2(3.048,0)
  silkscreen extent -1.27,-1.68 4.19,1.68
CAP-D [mm] "钽电容100uF/16V"
  rect 2.6x3.8 smd: 1(0,0) 2(6.35,0)
  silkscreen extent -1.78,-2.41 8,2.41
CH2.54-2 [mil]
  rect 70x70 hole 40: 1(0,0)
  round 70 hole 40: 2(100,0)
  silkscreen extent -100,-100 200,100, body extent -100,-100 200,100, height 276
CH2.54-4 [mil]
  rect 70x70 hole 40: 1(0,0)
  round 70 hole 40: 2(100,0) 3(200,0) 4(300,0)
  silkscreen extent -100,-100 400,100
E100 [mil]
  rect 60x60 hole 28: 1(0,0)
  round 60 hole 28: 2(200,0)
  silkscreen extent -100,-200 300,200
EE13-C#1 [mm]
  rect 2x2 hole 1.016: 1(0,0)
  round 2 hole 1.016: 2(0,-5.68) 3(10.68,0) 5(10.68,-5.68)
  round 1.5 hole 1.016: 4(10.68,-2.84)
  silkscreen extent -1.41,-9.59 12.09,3.91, body extent -1.41,-9.59 12.09,3.91, height 9.35
EE13-C#2 [mm]
  rect 2x2 hole 1.016: 1(0,0)
  round 2 hole 1.016: 2(0,-5.68) 3(10.68,0) 4(10.68,-2.84) 5(10.68,-5.68)
  silkscreen extent -1.41,-9.59 12.09,3.91, body extent -1.41,-9.59 12.09,3.91, height 9.35
G6J-2P [mm] "W5.7*L10.6*H9"
  round 1.5 hole 0.85: 1(0,0) 2(0,-3.2) 3(0,-5.4) 4(0,-7.6) 5(3.2,-7.6) 6(3.2,-5.4) 7(3.2,-3.2) 8(3.2,0)
  silkscreen extent -1.25,-9.1 4.5,1.5
IDC3-20 [mil] "JTAG"
  rect 60x70 hole 35: 1(0,0)
  oval 60x70 hole 35: 2(0,100) 3(100,0) 4(100,100) 5(200,0) 6(200,100) 7(300,0) 8(300,100) 9(400,0) 10(400,100) 11(500,0) 12(500,100) 13(600,0) 14(600,100) 15(700,0) 16(700,100) 17(800,0) 18(800,100) 19(900,0) 20(900,100)
  silkscreen extent -196,-118 1096,218
KEY-6A [mil]
  oval 70x60 hole 40: 1(-125,-90) 1(125,-90) 2(-125,90) 2(125,90)
  silkscreen extent -120,-119 120,121
LED(贴片) [mil]
  rect 70x50 smd: 1(0,0) 2(-100,0)
  silkscreen extent -145,-45 45,45
LQFP48 [mm]
  oval 1.5x0.3 smd: 1(0,0) 2(0,-0.5) 3(0,-1) 4(0,-1.5) 5(0,-2) 6(0,-2.5) 7(0,-3) 8(0,-3.5) 9(0,-4) 10(0,-4.5) 11(0,-5) 12(0,-5.5) 25(8.5,-5.5) 26(8.5,-5) 27(8.5,-4.5) 28(8.5,-4) 29(8.5,-3.5) 30(8.5,-3) 31(8.5,-2.5) 32(8.5,-2) 33(8.5,-1.5) 34(8.5,-1) 35(8.5,-0.5) 36(8.5,0)
  oval 0.3x1.5 smd: 13(1.5,-7) 14(2,-7) 15(2.5,-7) 16(3,-7) 17(3.5,-7) 18(4,-7) 19(4.5,-7) 20(5,-7) 21(5.5,-7) 22(6,-7) 23(6.5,-7) 24(7,-7) 37(7,1.5) 38(6.5,1.5) 39(6,1.5) 40(5.5,1.5) 41(5,1.5) 42(4.5,1.5) 43(4,1.5) 44(3.5,1.5) 45(3,1.5) 46(2.5,1.5) 47(2,1.5) 48(1.5,1.5)
  silkscreen extent -0.27,-5.71 7.21,1.02
LQFP144 [mm]
  oval 0.254x2.54 smd: 1(0,0) 2(0.5,0) 3(1,0) 4(1.5,0) 5(2,0) 6(2.5,0) 7(3,0) 8(3.5,0) 9(4,0) 10(4.5,0) 11(5,0) 12(5.5,0) 13(6,0) 14(6.5,0) 15(7,0) 16(7.5,0) 17(8,0) 18(8.5,0) 19(9,0) 20(9.5,0) 21(10,0) 22(10.5,0) 23(11,0) 24(11.5,0) 25(12,0) 26(12.5,0) 27(13,0) 28(13.5,0) 29(14,0) 30(14.5,0) 31(15,0) 32(15.5,0) 33(16,0) 34(16.5,0) 35(17,0) 36(17.5,0) 73(17.5,22) 74(17,22) 75(16.5,22) 76(16,22) 77(15.5,22) 78(15,22) 79(14.5,22) 80(14,22) 81(13.5,22) 82(13,22) 83(12.5,22) 84(12,22) 85(11.5,22) 86(11,22) 87(10.5,22) 88(10,22) 89(9.5,22) 90(9,22) 91(8.5,22) 92(8,22) 93(7.5,22) 94(7,22) 95(6.5,22) 96(6,22) 97(5.5,22) 98(5,22) 99(4.5,22) 100(4,22) 101(3.5,22) 102(3,22) 103(2.5,22) 104(2,22) 105(1.5,22) 106(1,22) 107(0.5,22) 108(0,22)
  oval 2.54x0.254 smd: 37(19.75,2.25) 38(19.75,2.75) 39(19.75,3.25) 40(19.75,3.75) 41(19.75,4.25) 42(19.75,4.75) 43(19.75,5.25) 44(19.75,5.75) 45(19.75,6.25) 46(19.75,6.75) 47(19.75,7.25) 48(19.75,7.75) 49(19.75,8.25) 50(19.75,8.75) 51(19.75,9.25) 52(19.75,9.75) 53(19.75,10.25) 54(19.75,10.75) 55(19.75,11.25) 56(19.75,11.75) 57(19.75,12.25) 58(19.75,12.75) 59(19.75,13.25) 60(19.75,13.75) 61(19.75,14.25) 62(19.75,14.75) 63(19.75,15.25) 64(19.75,15.75) 65(19.75,16.25) 66(19.75,16.75) 67(19.75,17.25) 68(19.75,17.75) 69(19.75,18.25) 70(19.75,18.75) 71(19.75,19.25) 72(19.75,19.75) 109(-2.25,19.75) 110(-2.25,19.25) 111(-2.25,18.75) 112(-2.25,18.25) 113(-2.25,17.75) 114(-2.25,17.25) 115(-2.25,16.75) 116(-2.25,16.25) 117(-2.25,15.75) 118(-2.25,15.25) 119(-2.25,14.75) 120(-2.25,14.25) 121(-2.25,13.75) 122(-2.25,13.25) 123(-2.25,12.75) 124(-2.25,12.25) 125(-2.25,11.75) 126(-2.25,11.25) 127(-2.25,10.75) 128(-2.25,10.25) 129(-2.25,9.75) 130(-2.25,9.25) 131(-2.25,8.75) 132(-2.25,8.25) 133(-2.25,7.75) 134(-2.25,7.25) 135(-2.25,6.75) 136(-2.25,6.25) 137(-2.25,5.75) 138(-2.25,5.25) 139(-2.25,4.75) 140(-2.25,4.25) 141(-2.25,3.75) 142(-2.25,3.25) 143(-2.25,2.75) 144(-2.25,2.25)
  silkscreen extent -0.76,0 17.82,20.13
M0805 [mil]
  rect 60x50 smd: 1(-49.68,-0.37) 2(50.32,-0.37)
  silkscreen extent -95,-45 95,45, body extent -39,-25 39,25, height 31
M1206 [mm]
  rect 1.8x1.6 smd: 1(-1.9,0) 2(1.9,0)
  silkscreen extent -3.1,-1.3 3.1,1.3, body extent -1.96,-1.3 1.9,1.3, height 1.5
PZ-4-0.8B [mil]
  rect 20x39.37 smd: 1(0,-10)
  oval 20x39.37 smd: 2(32,-10) 3(64,-10) 4(96,-10) 5(96,74) 6(64,74) 7(32,74) 8(0,74)
  silkscreen extent -16,-50 112,88
QFN32 [mm]
  oval 1.2x0.305 smd: 1(0,0) 2(0,-0.5) 3(0,-1) 4(0,-1.5) 5(0,-2) 6(0,-2.5) 7(0,-3) 8(0,-3.5) 17(5.383,-3.5) 18(5.383,-3) 19(5.383,-2.5) 20(5.383,-2) 21(5.383,-1.5) 22(5.383,-1) 23(5.383,-0.5) 24(5.383,0)
  oval 0.305x1.2 smd: 9(0.929,-4.429) 10(1.429,-4.429) 11(1.929,-4.429) 12(2.429,-4.429) 13(2.929,-4.429) 14(3.429,-4.429) 15(3.929,-4.429) 16(4.429,-4.429) 25(4.429,0.929) 26(3.929,0.929) 27(3.429,0.929) 28(2.929,0.929) 29(2.429,0.929) 30(1.929,0.929) 31(1.429,0.929) 32(0.929,0.929)
  rect 3.302x3.302 smd: 33(2.655,-1.753)
  oval 1x0.3 smd rot 135: 34(5.334,-4.42) 36(0.076,0.864)
  oval 1x0.3 smd rot 45: 35(5.309,0.864) 37(0.076,-4.369)
  silkscreen extent -2,-5.33 6.32,1.88
RB1/2 [mm]
  round 1.4 hole 0.711: 1(0,0) 2(2.3,0)
  silkscreen extent -1.1,-2.25 3.4,2.25
SIP2.54-2 [mil]
  rect 60x60 hole 40: 1(0,0)
  round 60 hole 40: 2(100,0)
  silkscreen extent -50,-50 150,50, body extent -53,-53 153,53, height 945
SIP2.54-11 [mm]
  rect 1.5x1.5 hole 0.9: 1(0,0)
  round 1.5 hole 0.9: 2(-2.54,0) 3(-5.08,0) 4(-7.62,0) 5(-10.16,0) 6(-12.7,0) 7(-15.24,0) 8(-17.78,0) 9(-20.32,0) 10(-22.86,0) 11(-25.4,0)
  silkscreen extent -26.72,-1.27 1.27,1.27, body extent -26.72,-1.27 1.27,1.27, height 24
SIP2.54-18 [mm]
  rect 1.5x1.5 hole 0.9: 1(0,0)
  round 1.5 hole 0.9: 2(2.54,0) 3(5.08,0) 4(7.62,0) 5(10.16,0) 6(12.7,0) 7(15.24,0) 8(17.78,0) 9(20.32,0) 10(22.86,0) 11(25.4,0) 12(27.94,0) 13(30.48,0) 14(33.02,0) 15(35.56,0) 16(38.1,0) 17(40.64,0) 18(43.18,0)
  silkscreen extent -1.27,-1.3 44.45,1.3, body extent -1.27,-1.3 44.5,1.3, height 24
SO-8 [mm]
  rect 2.4x0.8 smd: 1(0,0)
  oval 2.4x0.8 smd: 2(0,-1.27) 3(0,-2.54) 4(0,-3.81) 5(5.08,-3.81) 6(5.08,-2.54) 7(5.08,-1.27) 8(5.08,0)
  silkscreen extent 0,-4.7 5.08,0.89, body extent -0.38,-4.32 5.62,0.58
so-8 [mm]
  rect 2.4x0.8 smd: 1(0,0)
  oval 2.4x0.8 smd: 2(0,-1.27) 3(0,-2.54) 4(0,-3.81) 5(5.08,-3.81) 6(5.08,-2.54) 7(5.08,-1.27) 8(5.08,0)
  silkscreen extent 0,-4.7 5.08,0.89, body extent -0.38,-4.32 5.62,0.58
SOD-323 [mm]
  rect 1x1 smd: A(0,0) K(2.23,0)
  silkscreen extent 0,-0.8 2.2,0.8
SOP4 [mil] "TLP281"
  rect 64x24 smd: 1(0,0)
  oval 64x24 smd: 2(0,-50) 3(240,-50) 4(240,0)
  silkscreen extent 39,-75 201,31, body extent 34,-80 206,36, height 59
SOP-16 [mm] "网络变压器1102"
  rect 2x0.8 smd: 1(0,0)
  oval 2x0.8 smd: 2(0,-1.27) 3(0,-2.54) 4(0,-3.81) 5(0,-5.08) 6(0,-6.35) 7(0,-7.62) 8(0,-8.89) 9(10.172,-8.89) 10(10.172,-7.62) 11(10.172,-6.35) 12(10.172,-5.08) 13(10.172,-3.81) 14(10.172,-2.54) 15(10.172,-1.27) 16(10.172,0)
  silkscreen extent 1.73,-9.6 8.41,0.66, body extent 1.73,-9.6 8.41,0.66, height 6
SOT-23-5+ [mm]
  rect 1.016x0.3 smd: 1(0,0) 2(0,-0.7) 3(0,-1.4) 4(2.794,-1.4) 5(2.794,0)
  silkscreen extent 0.76,-1.79 2.05,0.46
SOT-23B_N [mm]
  rect 1.15x0.6 smd: 1(-1.125,0.95) 2(-1.125,-0.95) 3(1.125,0)
  silkscreen extent -1.25,-1.5 0.7,1.92, body extent -1.35,-1.46 1.12,1.46, height 1
SOT-143 [mm]
  rect 0.9x1.2 smd: 1(0,0)
  rect 0.6x1.2 smd: 2(1.92,0) 3(1.92,2.64) 4(0,2.64)
  silkscreen extent -1,-0.83 3.03,3.52
TO-252-1 [mm]
  rect 1.4x2 smd: 1(0,0) 2(2.311,0) 3(4.623,0)
  rect 7x9 smd: 4(2.3,7.3)
  silkscreen extent -1.72,1.52 6.26,7.51
XTAL-D [mil] "25MHz 晶体"
  round 68 hole 32: 1(0,0) 2(200,0)
  silkscreen extent -113,-85 313,85
XTAL-XO53 [mm]
  rect 1.6x2 smd: 1(0,0) 2(2.54,0) 3(2.54,2.794) 4(0,2.794)
  silkscreen extent -1.9,-1.07 3.76,2.87
YND5-48D12 [mm]
  rect 3.81x3.81 hole 1.5: 1(0,-2.54)
  round 3.81 hole 1.5: 2(0,2.54) 3(20.32,10.16) 4(20.32,0) 5(20.32,-10.16)
  silkscreen extent -2.7,-12.81 23,12.79, body extent -2.7,-12.81 23,12.79, height 7

## Part data
C1 C3 C5 C8 C9 C11 C13 C16 C17 C18 C20 C21 C22 C23 C24 C26 C27 C29 C33 C35 C36 C37 C46 C53 C54 C55 C57 C58 C61 C63 C65 C67 C69 C71 C72 C73 C75 C76 C78 C80 C82 C83: library part CAP, "Capacitor"
C2 C6 C10 C12 C14 C19 C64: library part E
C7 C38 C45: library part "CAPACITOR POL", "Capacitor"
C15 C30 C56 C59 C62 C70 C74: library part CAP2, "Bi-Polar Capacitor"
C31 C34 C39 C40 C41 C42 C43 C44 C47 C48 C49 C50 C51 C52: library part CAP
C60 C66 C81: library part Cap, "Capacitor"
C68 C77: library part CAPBP2, "Bi-Polar Capacitor"
D1 D2 D3 D14 D15 D16 D17 D19: "Default Diode"
D4: library part DIODE, "Diode"
D7: library part D
D10 D13: library part "DIODE SCHOTTKY", "Schottky Diode"
J1 J3 J4 J6: "Connector"
J2: library part "HEADER 10X2"
JP1: library part TX
L6 R1 R5 R7 R9 R10 R23 R24 R25 R32 R37 R38 R43 R49 R50 R55 R56 R57 R58 R59 R60 R61 R62 R63 R64 R67 R68 R70 R71 R74 R75 R76 R80 R97 R98 R99 R103 R105: library part Res3, "Resistor"
LED1 LED2: library part LED
O4 O5 O6 O7 O8 O9 O10: library part Optoisolator1, "4-Pin Phototransistor Optocoupler"
Q1: library part NPN, "NPN Bipolar Transistor"
R2 R3 R8 R11 R12 R13 R14 R15 R18 R19 R20 R21 R22 R29 R30 R31 R33 R34 R35 R36 R40 R42 R44 R45 R46 R47 R48 R53 R54 R65 R66: library part RES1
R4 R17 R26: library part RES-P4
R6: "Resistor"
R90 R91 R92 R93 R94 R95 R96: library part R
Re1: library part G6J-2P
T6: library part TRANS7
U9: library part AT24C32
U10: library part YND5-48D12
U12: library part LT1085
X1: library part CRYSTAL, "Crystal"
Y1 Y2: library part XTAL

## Free pads (board coordinates)
  rect 200x140 smd: 0(1102,2451)
  round 200 hole 118.11: 8(118.11,118.11) 8(118.11,3661.42) 8(3267.72,3661.42)

## Via types
v1: diameter 28, hole 16, Top Layer to Bottom Layer, 240 vias
v2: diameter 30, hole 15, Top Layer to Bottom Layer, 25 vias
v3: diameter 35, hole 15, Top Layer to Bottom Layer, 16 vias
v4: diameter 30, hole 18, Top Layer to Bottom Layer, 10 vias
v5: diameter 40, hole 20, Top Layer to Bottom Layer, 9 vias
v6: diameter 50, hole 25, Top Layer to Bottom Layer, 7 vias
v7: diameter 50, hole 28, Top Layer to Bottom Layer, 5 vias
v8: diameter 36, hole 20, Top Layer to Bottom Layer, 1 vias

## Nets (pads, with @x,y where several pads share a name; then routed paths per layer and width w, separated by ;. In a path a pad name is that pad's centre, name@x,y a point inside that pad or via, vN(x,y) a via of type N, cw(c..) or ccw(c..) an arc to the next point about the centre after c; other vN are vias at no path point)
0DB_CPU: J5.6 U1.56 | length 1266.1
  Top Layer w10: J5.6@157.48,2059.06 268.94,2059.06 305,2023 305,1626 353.6,1577.4 U1.56@843.44,1577.4 ; J5.6@167.75,2048.78 cw(c192.55,2023.98) 192.55,2059.06 cw(c192.55,2094.13) J5.6@167.75,2069.33 ; J5.6@174.82,2041.71 cw(c216.69,1999.84) 216.69,2059.06 cw(c216.69,2118.27) J5.6@174.82,2076.4
3V3A: C68.1 C73.2 L6.1 U5.5 | length 667.5
  Top Layer w10: C68.1@366,811 C68.1@367,812 403.26,848.26 ; C68.1@372,832 ccw(c372,868.21) 397.61,842.61 ; C68.1@381.91,813.3 cw(c406.32,816.51) C68.1@388.91,833.91 ; C68.1@391.83,814.61 cw(c431.67,819.84) 403.26,848.26 ; U5.5@510,848.26 403.26,848.26
  Top Layer w20: C73.2@355.39,726.61 ccw(c329.79,752.21) 366,752.21 ccw(c402.21,752.21) C73.2@376.61,726.61 ; C68.1@356.39,801.39 cw(c333.2,778.2) 366,778.2 ; C68.1@356.39,822.61 ccw(c330.79,848.21) 367,848.21 ccw(c403.21,848.21) C68.1@377.61,822.61 ; L6.1@358.07,897.76 cw(c336.51,876.2) 367,876.2 ; L6.1@363.68,908.37 367,905.05 C68.1@367,812 ; C73.2@366,716 C68.1@366,811 ; 366,773.37 cw(c405.63,773.37) C68.1@377.61,801.39 ; 367,868.11 cw(c408.94,868.11) L6.1@379.28,897.76
+3DB_CPU: J5.5 U1.55 | length 1353.5
  Top Layer w10: J5.5@157.48,2159.06 299.27,2159.06 327,2131.33 327,1642 371.91,1597.09 U1.55@843.44,1597.09 ; J5.5@167.75,2148.78 cw(c192.55,2123.98) 192.55,2159.06 cw(c192.55,2194.13) J5.5@167.75,2169.33 ; J5.5@174.82,2141.71 cw(c216.69,2099.84) 216.69,2159.06 cw(c216.69,2218.27) J5.5@174.82,2176.4
+24VGND: D1.K D2.K J6.6 | length 414
  Bottom Layer w50: 1533.07,3605.89 ccw(c1597.14,3605.89) D2.K@1551.83,3560.59 ; J6.6@1533.07,3661.41 1533.07,3576.18 1555.5,3553.75 D2.K@1555.5,3551.75 ; D2.K@1565.5,3543.75 D1.K@1706.5,3543.75 ; D2.K@1576.83,3560.59 ccw(c1617.49,3601.24) 1617.49,3543.75 ; 1657.43,3543.75 ccw(c1657.43,3618.31) D1.K@1710.16,3565.59
-3DB_CPU: J5.7 U1.57 | length 1180.1
  Top Layer w10: J5.7@157.48,1959.06 243.94,1959.06 284,1919 284,1612 338.28,1557.72 U1.57@843.44,1557.72 ; J5.7@167.75,1948.78 cw(c192.55,1923.98) 192.55,1959.06 cw(c192.55,1994.13) J5.7@167.75,1969.33 ; J5.7@174.82,1941.71 cw(c216.69,1899.84) 216.69,1959.06 cw(c216.69,2018.27) J5.7@174.82,1976.4
-6DB_CPU: J5.8 U1.58 | length 1089
  Top Layer w10: J5.8@157.48,1859.06 215.94,1859.06 ; J5.8@167.85,1848.88 cw(c192.11,1825.05) 192.11,1859.06 cw(c192.11,1893.06) J5.8@167.85,1869.23 ; J5.8@174.98,1841.87 cw(c215.94,1801.65) 215.94,1859.06 ; J5.8@174.98,1876.24 ccw(c215.94,1916.46) 215.94,1859.06 ; U1.58@843.44,1538.03 323.97,1538.03 263,1599 263,1812 215.94,1859.06
-9DB_CPU: J5.9 U1.59 | length 906.7
  Top Layer w10: J5.9@157.48,1759.06 197.94,1759.06 ; J5.9@179.23,1747.71 cw(c197.94,1737.94) 197.94,1759.06 ; J5.9@179.23,1770.4 ccw(c197.94,1780.17) 197.94,1759.06 ; U1.59@843.44,1518.35 310.65,1518.35 241,1588 241,1716 197.94,1759.06
ADDR1: D15.K J6.18 | length 704.9
  Top Layer w15: J6.18@2717.5,3645.84 cw(c2679.89,3608.23) 2733.07,3608.23 cw(c2786.25,3608.23) J6.18@2748.65,3645.84 ; J6.18@2733.07,3661.41 2733.07,3591.93 3077.5,3247.5 D15.K@3077.5,3182.75
ADDR1_CPU: O7.4 R56.2 U1.112 | length 2950.5
  Top Layer w10: U1.112@1709.58,1321.5 2751,1321.5 2810,1380.5 2810,2318 2929,2437 3290,2437 3307.65,2454.65 R56.2@3307.65,2520.26 ; R56.2@3293.51,2506.12 cw(c3259.36,2471.98) 3307.65,2471.98 cw(c3355.93,2471.98) R56.2@3321.79,2506.12
  Top Layer w15: R56.2@3300.27,2532.63 ccw(c3257.48,2575.43) 3318,2575.43 ; R56.2@3307.65,2520.26 3318,2530.61 O7.4@3318,2642 ; 3318,2549.59 ccw(c3341.97,2549.59) R56.2@3325.02,2532.63
ADDR2: D14.K J6.16 | length 936
  Top Layer w15: J6.16@2517.5,3645.84 cw(c2479.89,3608.23) 2533.07,3608.23 cw(c2586.25,3608.23) J6.16@2548.65,3645.84 ; J6.16@2533.07,3661.41 2533.07,3509.93 2749.5,3293.5 ; D14.K@2749.5,3178.75 2749.5,3293.5 ; D14.K@2749.5,3212.15 ccw(c2793.31,3212.15) D14.K@2770.03,3175.04 ; 2749.5,3239.27 ccw(c2810.31,3239.27) D14.K@2778,3187.75 ; 2749.5,3266.38 ccw(c2827.31,3266.38) D14.K@2785.97,3200.46 ; D14.K@2793.94,3213.17 cw(c2844.32,3293.49) 2749.5,3293.49
ADDR2_CPU: O6.4 R55.2 U1.115 | length 2537.6
  Top Layer w10: U1.115@1709.58,1380.55 2706.55,1380.55 2766,1440 2766,2342 2901.65,2477.65 ; R55.2@2888.6,2506.1 cw(c2864.1,2477.65) 2901.65,2477.65 ; R55.2@2892.51,2535.4 ccw(c2850.27,2577.64) 2910,2577.64 ; R55.2@2899.58,2528.33 ccw(c2874.41,2553.5) 2910,2553.5 ; O6.4@2905.05,2617.05 cw(c2893.1,2605.1) 2910,2605.1 cw(c2926.9,2605.1) O6.4@2914.95,2617.05 ; 2910,2561.45 ccw(c2946.84,2561.45) R55.2@2920.79,2535.4 ; O6.4@2910,2642 2910,2529.61 R55.2@2901.65,2521.26 2901.65,2477.65 ; R55.2@2914.7,2506.1 ccw(c2939.19,2477.65) 2901.65,2477.65
ADDR3: D17.K J6.17 | length 918.1
  Top Layer w15: J6.17@2617.5,3645.84 cw(c2579.89,3608.23) 2633.07,3608.23 cw(c2686.25,3608.23) J6.17@2648.65,3645.84 ; J6.17@2633.07,3661.41 2633.07,3577.93 2918.5,3292.5 ; D17.K@2918.5,3178.75 2918.5,3292.5 ; 2918.5,3238.78 ccw(c2978.43,3238.78) D17.K@2947,3187.75 ; 2918.5,3265.64 ccw(c2994.98,3265.64) D17.K@2954.87,3200.52 ; D17.K@2962.74,3213.3 cw(c3011.52,3292.49) 2918.5,3292.49
ADDR3_CPU: O9.4 R62.2 U1.114 | length 2626.3
  Top Layer w10: U1.114@1709.58,1360.87 2729.87,1360.87 2788,1419 2788,2330.69 2922.65,2465.35 2997.35,2465.35 3013,2481 ; R62.2@3001,2505 cw(c2983,2481) 3013,2481 ; R62.2@3013,2521 3013,2481 ; R62.2@3025,2505 ccw(c3043,2481) 3013,2481
  Top Layer w15: R62.2@3013,2521 3114,2622 O9.4@3114,2642 ; R62.2@3018,2538.5 ccw(c3018,2568.68) 3039.34,2547.34 ; R62.2@3035.5,2521 cw(c3089.82,2521) 3051.41,2559.41
ADDR4: D16.K J6.15 | length 991.2
  Top Layer w15: J6.15@2417.5,3645.84 cw(c2379.89,3608.23) 2433.07,3608.23 cw(c2486.25,3608.23) J6.15@2448.65,3645.84 ; J6.15@2433.07,3661.41 2433.07,3486.93 2588.5,3331.5 D16.K@2588.5,3180.75 ; D16.K@2588.5,3222.34 ccw(c2649.6,3222.34) D16.K@2606.4,3179.15 ; 2588.5,3258.56 ccw(c2685.81,3258.56) D16.K@2617,3189.75 ; 2588.5,3294.77 ccw(c2722.02,3294.77) D16.K@2627.61,3200.36 ; 2588.5,3330.98 ccw(c2758.24,3330.98) D16.K@2638.22,3210.97
ADDR4_CPU: O8.4 R61.2 U1.116 | length 2733.5
  Top Layer w10: U1.116@1709.58,1400.24 2686.24,1400.24 2744,1458 2744,2418 2703,2459 2638,2459 ; R61.2@2598.31,2502.54 cw(c2593.5,2491) 2606,2491 ; R61.2@2602,2525.36 ccw(c2630.76,2511.43) 2608.17,2488.83 ; R61.2@2611,2521 ccw(c2644.17,2504.94) 2618.11,2478.89 ; R61.2@2611,2541 ccw(c2611,2577.21) 2636.61,2551.61 ; R61.2@2613.69,2502.54 ccw(c2618.5,2491) 2606,2491 ; R61.2@2620,2516.64 ccw(c2657.57,2498.46) 2628.05,2468.95 ; R61.2@2621,2521 cw(c2657.21,2521) 2631.61,2546.61 ; R61.2@2629,2512.29 ccw(c2670.97,2491.97) 2638,2459 ; R61.2@2631,2521 cw(c2691.36,2521) 2648.68,2563.68 ; 2693.34,2608.34 ccw(c2679.69,2622) O8.4@2699,2622 ; 2695.76,2610.76 cw(c2706,2600.51) O8.4@2706,2615 ; O8.4@2706,2642 2706,2621 R61.2@2606,2521 2606,2491 ; 2606,2491 2638,2459